# Altium PCB BatteryManagementSystem_oldcpu.PcbDoc (part 1 of 2)
Units mil, origin at the board's own origin, x right, y up, seen from the top; angles counter-clockwise.
Board outline 5250 x 2500 mil, 4 copper layers (Top Layer, Internal Plane 2, Internal Plane 1, Bottom Layer); 223 components, 168 nets, 746 pads, 194 vias.
Unrouted connection lines stored in the file: 11.
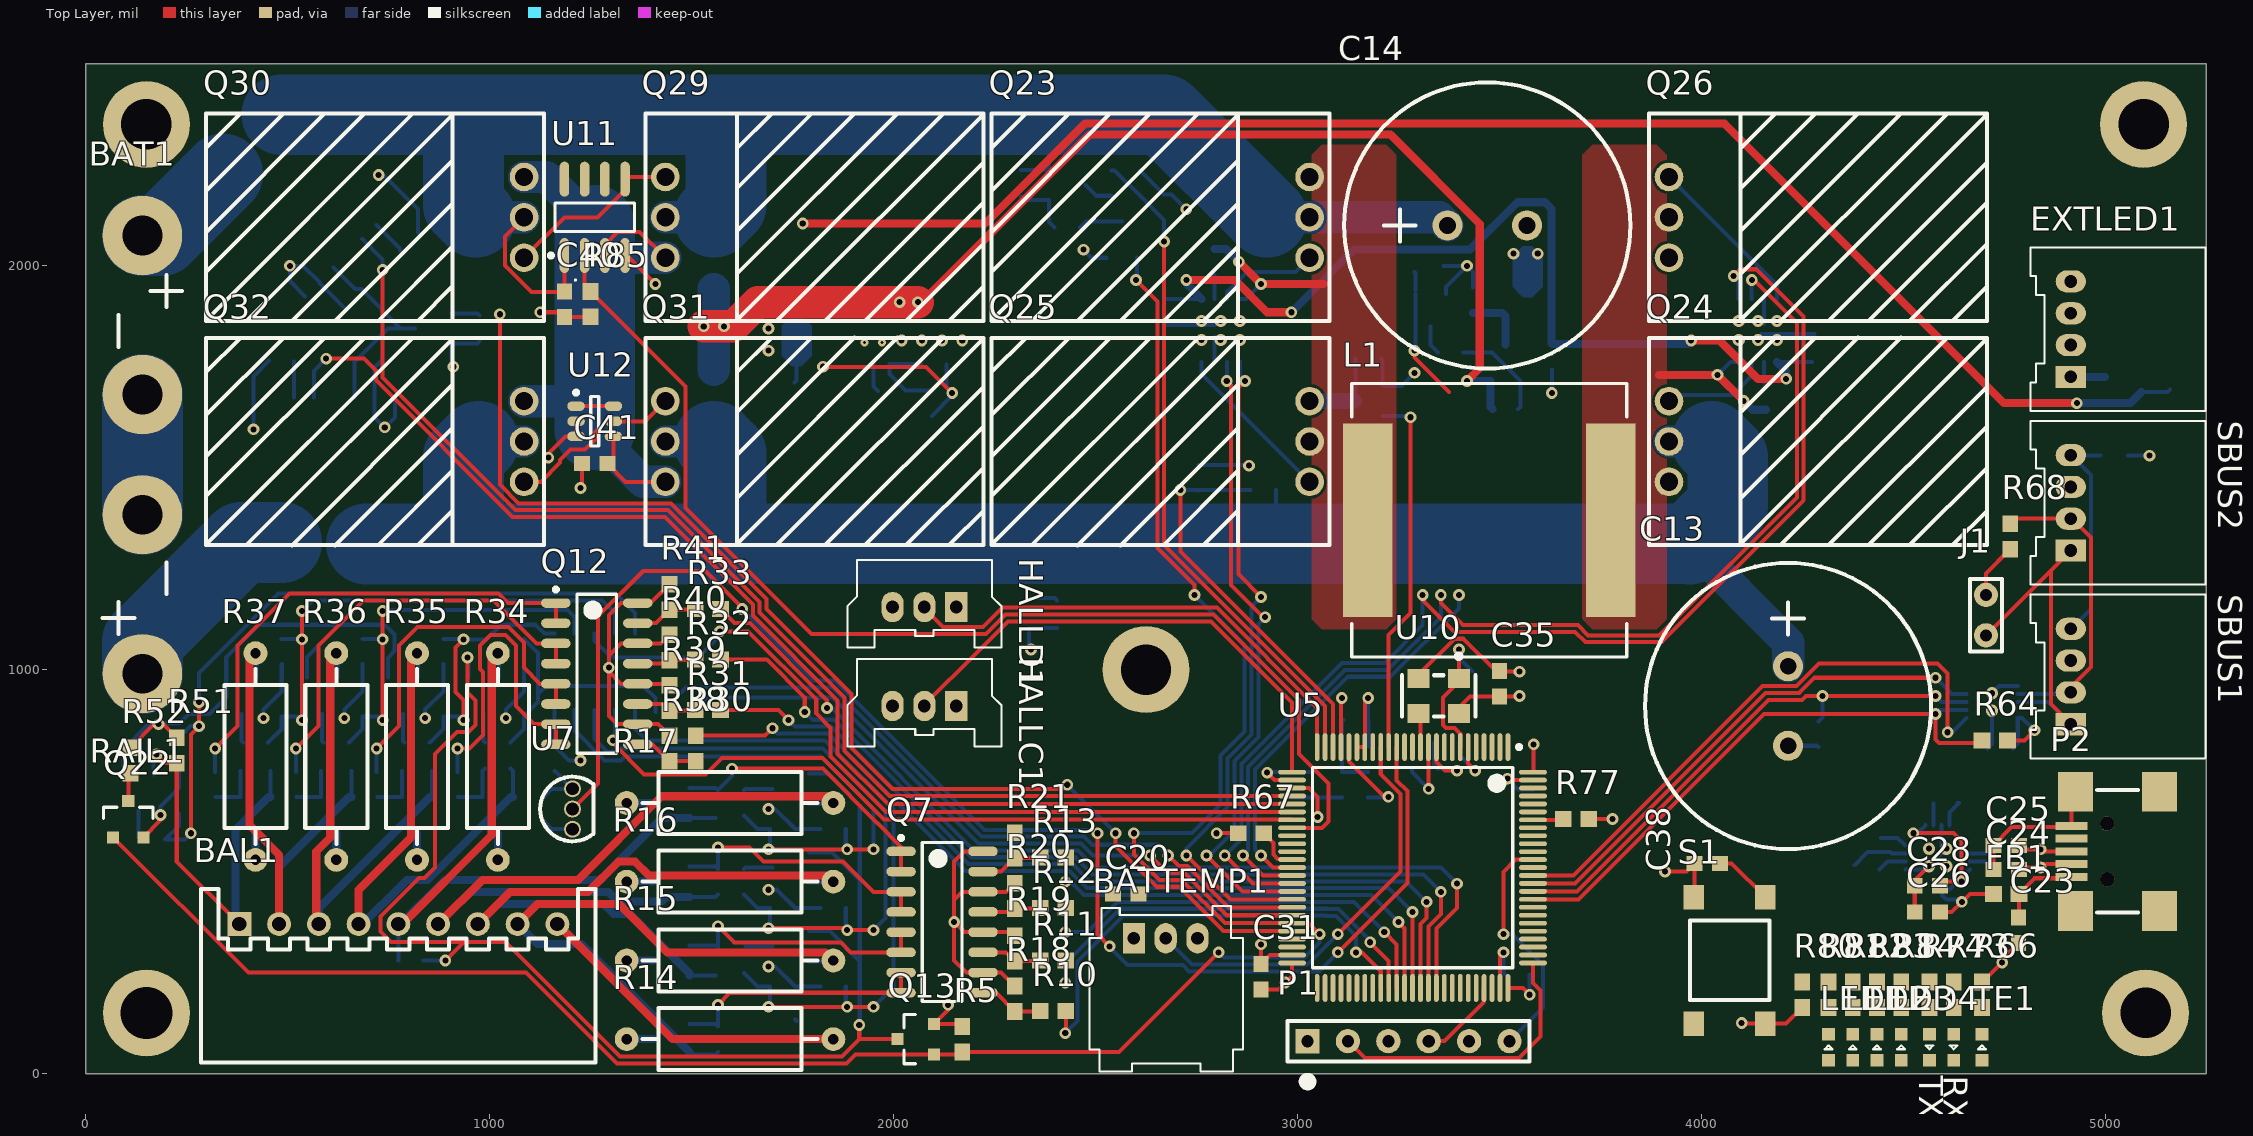
[diagram p0: Top Layer view]
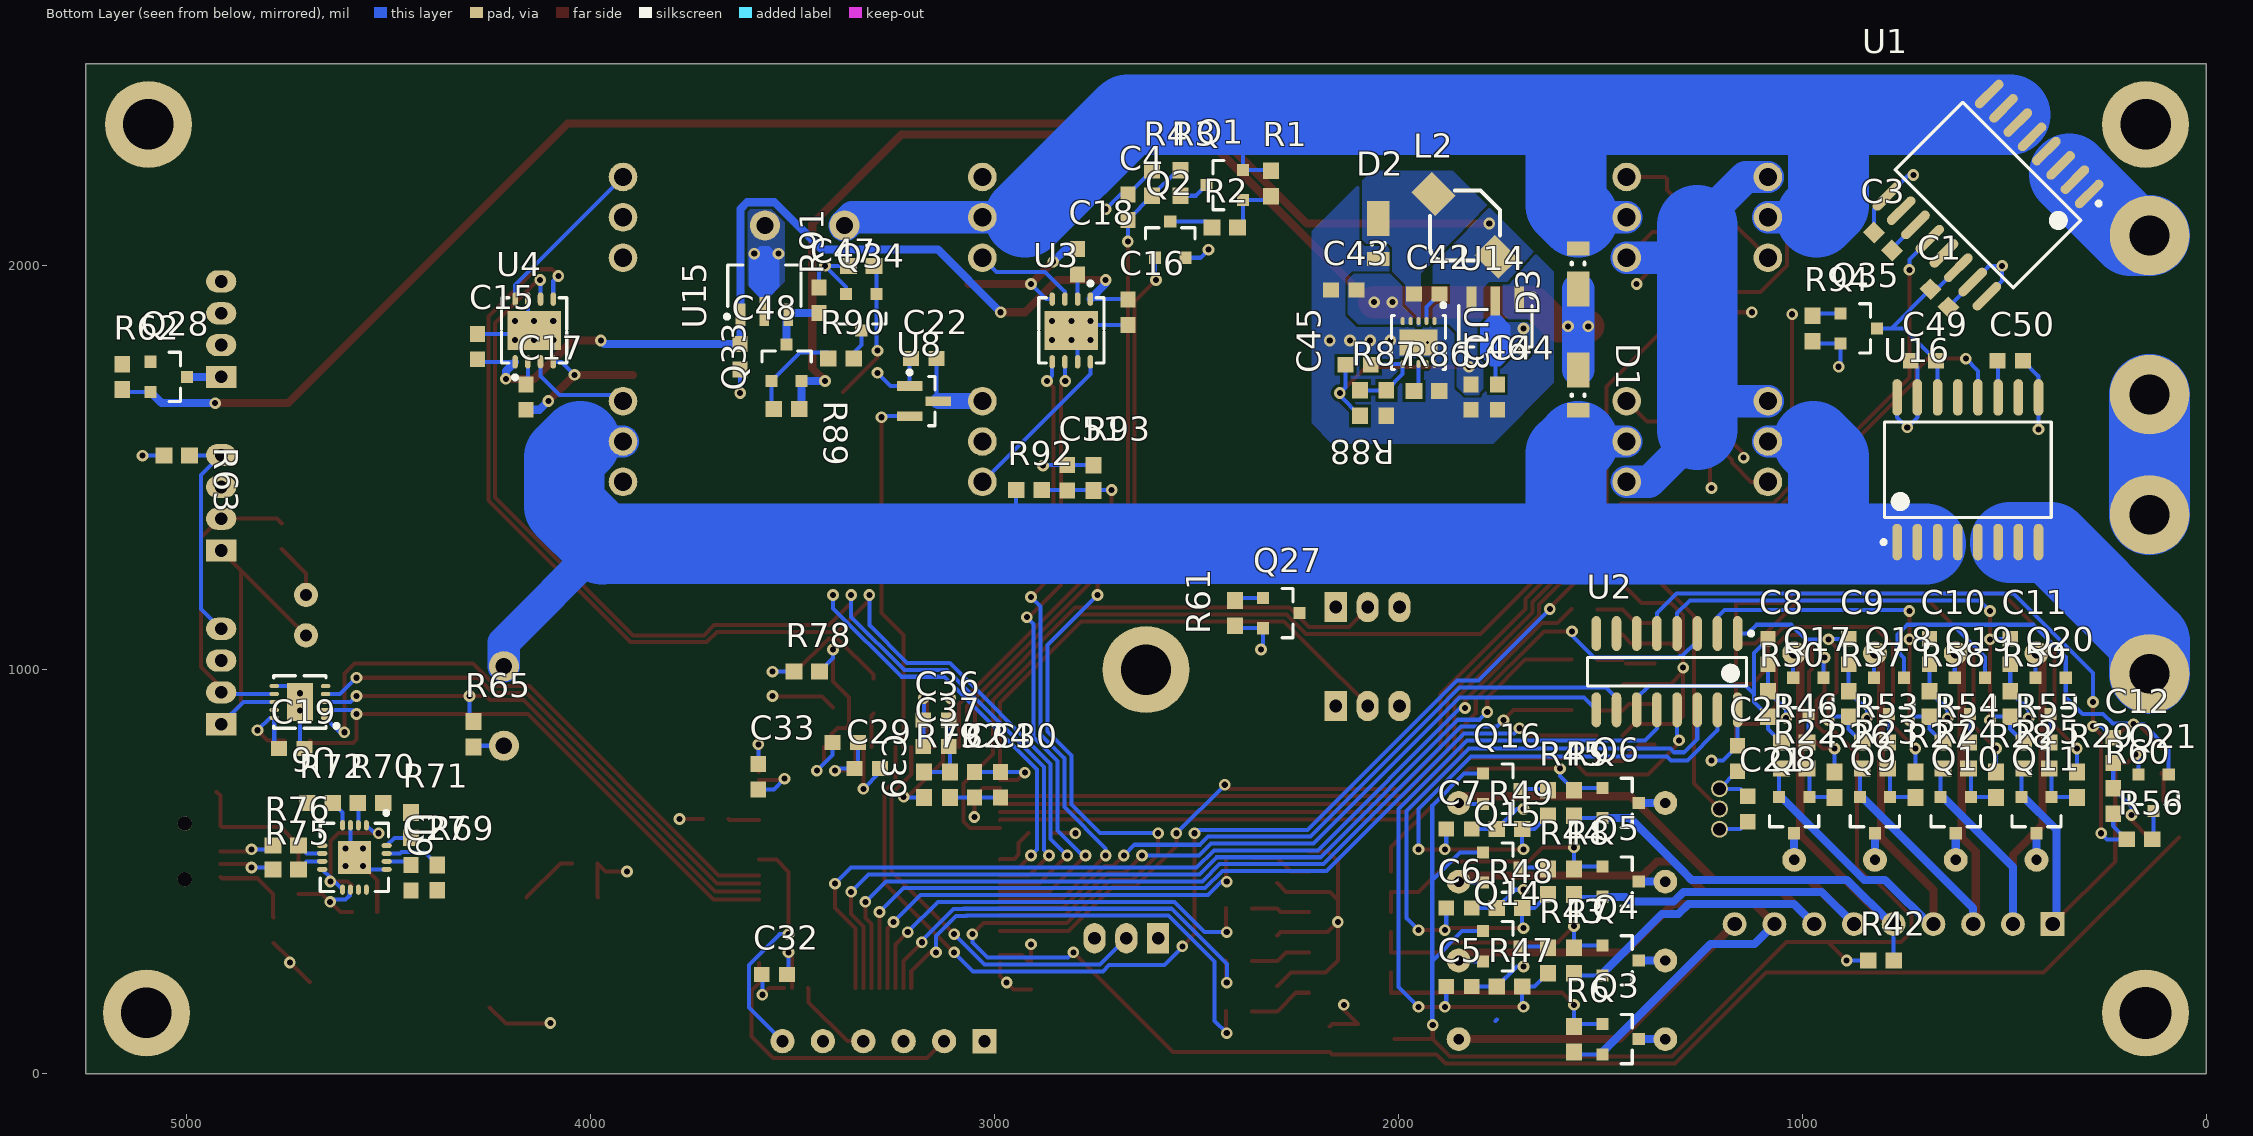
[diagram p1: Bottom Layer view, seen from below]
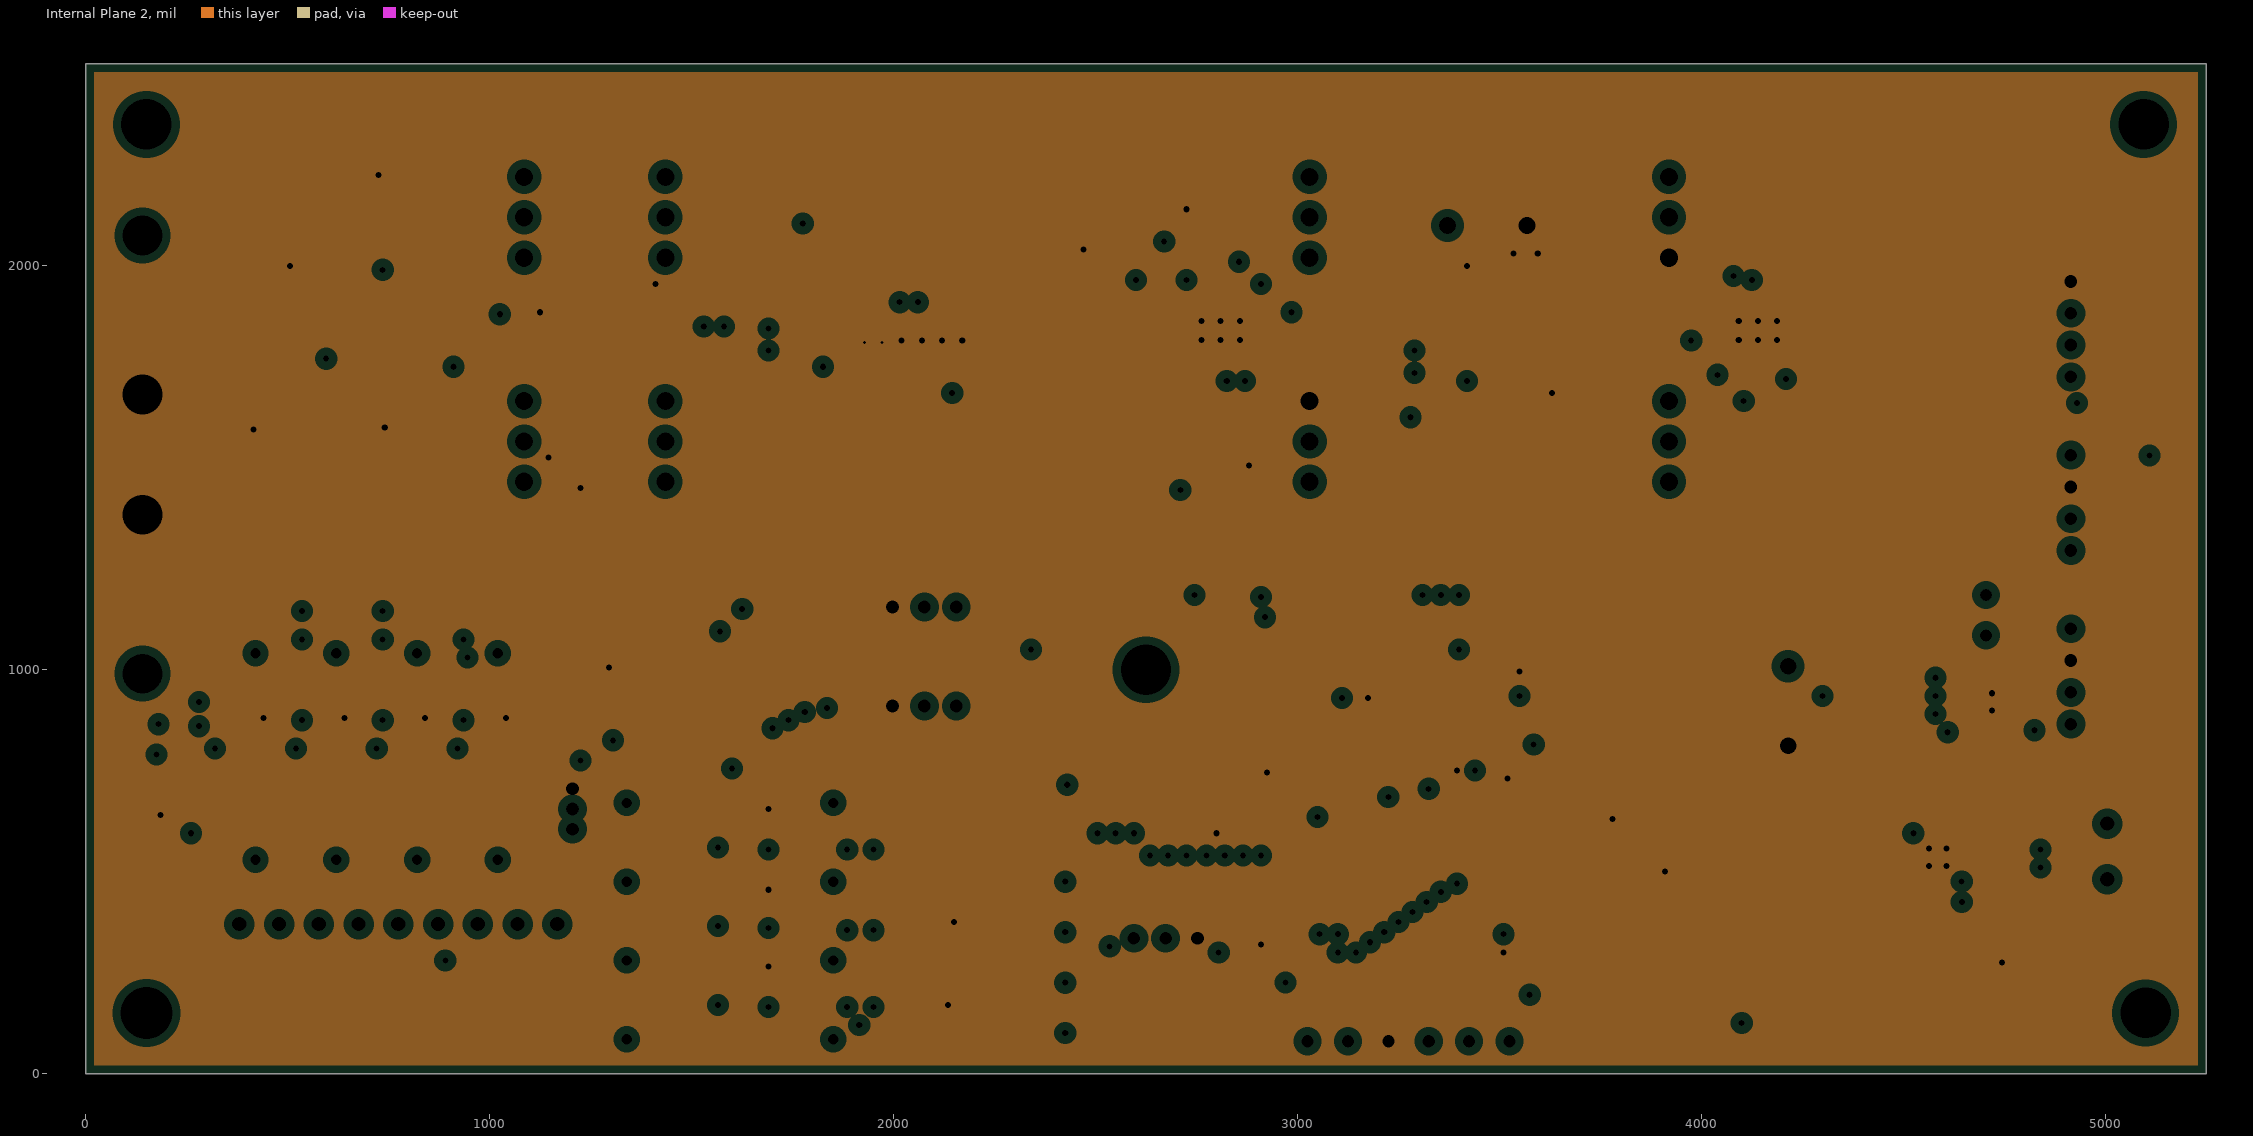
[diagram p2: Internal Plane 2, clearances drawn from the general rule]
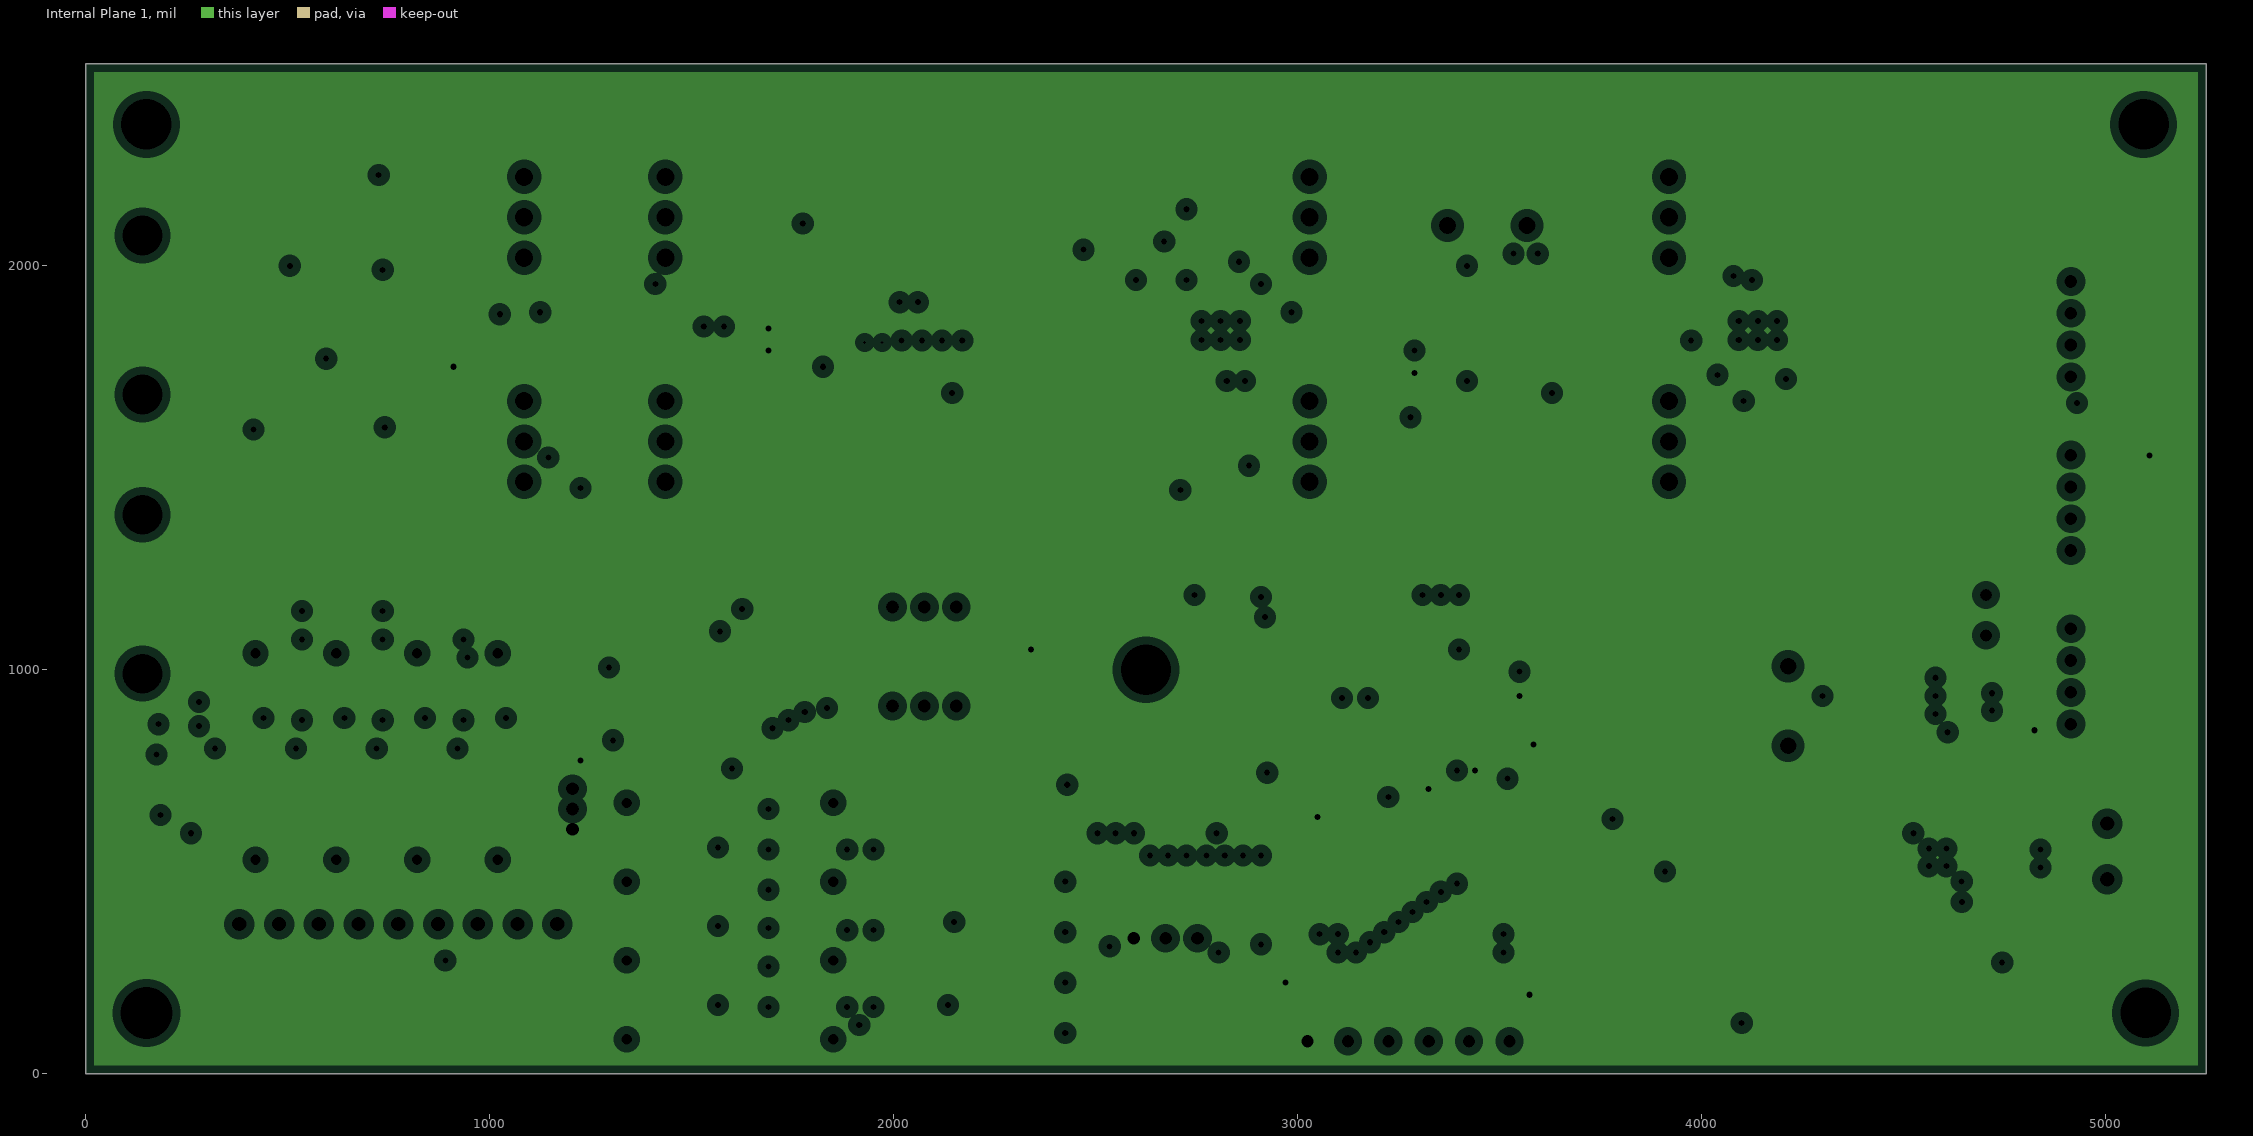
[diagram p3: Internal Plane 1, clearances drawn from the general rule]

## Layer stack, top to bottom
Top Layer: signal copper 1.4
Dielectric: core 12.6, FR-4, Dk 4.8
Internal Plane 2: plane copper 1.4, net GND
Dielectric: prepreg 12.6, FR-4, Dk 4.8
Internal Plane 1: plane copper 1.4, net 3V3
Dielectric: core 12.6, FR-4, Dk 4.8
Bottom Layer: signal copper 1.4

## Board outline
0,0 0,2500 5250,2500 5250,0

## Design rules (kind name [scope] priority, off if disabled: settings)
Clearance [All] p1: gap=7
HoleSize [All] p1: absolutevalues=TRUE maxlimit=100 minlimit=15 maxpercent=80.000 minpercent=20.000
MinimumAnnularRing [All] p1: minimumring=7
MinimumSolderMaskSliver [All] p1: minsoldermaskwidth=6
PlaneClearance [All] p1: clearance=20
PlaneConnect [All] p1: planeconnectstyle=Relief reliefexpansion=20 reliefentries=4 reliefconductorwidth=10 reliefairgap=10
PolygonConnect [All] p1: connectstyle=Direct reliefconductorwidth=10 reliefentries=4 polygonreliefangle="90 Angle" airgapwidth=10
RoutingVias [All] p1: holewidth=7 width=29 viastyle="Through Hole" minholewidth=7 minwidth=29 maxholewidth=28 maxwidth=50
SilkscreenOverComponentPads [IsPad] p1: minsilkscreentomaskgap=10
SolderMaskExpansion BlobMaskExpansion [InNetClass('Blob') AND IsTrack] p1: expansion=-25
SolderMaskExpansion [All] p2: expansion=4
Width BlobWidth [InNetClass('Blob')] p1: maxlimit=200 minlimit=10 preferedwidth=10
Width [All] p2: maxlimit=100 minlimit=10 preferedwidth=10
23 further rules are at their usual default settings.

## Classes and differential pairs
component class Top: Q35 R94
component class U_Battery: BAL1 BAT1 C1 C2 C3 C4 C5 C6 C7 C8 C9 C10 C11 C12 Q1 Q2 Q3 Q4 Q5 Q6 Q7 Q8 Q9 Q10 Q11 Q12 Q13 Q14 Q15 Q16 Q17 Q18 Q19 Q20 Q21 Q22 R1 R2 R3 R4 R5 R6 R7 R8 R9 R10 R11 R12 R13 R14 R15 R16 R17 R18 R19 R20 R21 R22 R23 R24 R25 R26 R27 R28 R29 R30 R31 R32 R33 R34 R35 R36 R37 R38 R39 R40 R41 R42 R43 R44 R45 R46 R47 R48 R49 R50 R51 R52 R53 R54 R55 R56 R57 R58 R59 R60 U1 U2
component class U_Charge: C13 C14 C15 C16 C17 C18 L1 Q23 Q24 Q25 Q26 U3 U4
component class U_CPU: BATTEMP1 C19 C20 C21 C22 C23 C24 C25 C26 C27 C28 C29 C30 C31 C32 C33 C34 C35 C36 C37 C38 C39 EXTLED1 FB1 FB2 HALLC1 HALLD1 J1 LED1 LED2 LED3 LED4 P1 P2 Q27 Q28 R61 R62 R63 R64 R65 R66 R67 R68 R69 R70 R71 R72 R73 R74 R75 R76 R77 R78 R79 R80 R81 R82 R83 R84 RX1 S1 SBUS1 SBUS2 TE1 TX1 U5 U6 U7 U8 U9 U10
component class U_Discharge: C40 C41 Q29 Q30 Q31 Q32 R85 U11 U12
component class U_Power: C42 C43 C44 C45 C46 C47 C48 D1 D2 D3 L2 Q33 Q34 R86 R87 R88 R89 R90 R91 U13 U14 U15
component class U_Rail: C49 C50 C51 R92 R93 RAIL1 U16
net class BAL[8..1]: BAL1 BAL2 BAL3 BAL4 BAL5 BAL6 BAL7 BAL8
net class Blob: BAT+ GND NetBAT1_+ NetC41_2 NetRAIL1_+ RAIL+

## Components (designator, comment, footprint, x,y, rotation, side; value= is the part's Value field where it differs from the comment)
BAL1 "JST1x9" JST1x9 380,370 r0 top
BAT1 "BATWIRE" BATWIRE12 140,2075 r270 top
BATTEMP1 "3pos RA sherlock connector" MOLEX-HDR-1X3-SHERLOCK-RA 2595,335 r180 top
C1 "Cap" CAPC0603 660,1920 r225 bottom
C2 "Cap" CAPC0603 1160,780 r270 bottom
C3 "Cap" CAPC0603 800,2060 r45 bottom
C4 "Cap" CAPC0603 2670,2145 r90 bottom
C5 "Cap" CAPC0603 1850,215 r180 bottom
C6 "Cap" CAPC0603 1850,410 r180 bottom
C7 "Cap" CAPC0603 1850,605 r180 bottom
C8 "Cap" CAPC0603 1085,1045 r270 bottom
C9 "Cap" CAPC0603 885,1045 r270 bottom
C10 "Cap" CAPC0603 685,1045 r270 bottom
C11 "Cap" CAPC0603 485,1045 r270 bottom
C12 "Cap" CAPC0603 230,800 r270 bottom
C13 "CapPol" CAP1000uF 4215,910 r270 top
C14 "CapPol" CAP1000uF 3470,2100 r0 top
C15 "Cap" CAPC0603 4280,1800 r90 bottom
C16 "Cap" CAPC0603 2670,1885 r270 bottom
C17 "Cap" CAPC0603 4160,1675 r90 bottom
C18 "Cap" CAPC0603 2795,2010 r270 bottom
C19 "Cap" CAPC0603 4740,805 r0 bottom
C20 "Cap" CAPC0603 2575,445 r180 top
C21 "Cap" CAPC0603 1135,655 r270 bottom
C22 "Cap" CAPC0603 3175,1770 r0 bottom
C23 "Cap" CAPC0603 4785,355 r270 top
C24 "Cap" CAPC0603 4755,505 r180 top
C25 "Cap" CAPC0603 4755,565 r180 top
C26 "Cap" CAPC0603 4560,400 r180 top
C27 "Cap" CAPC0603 4445,485 r270 bottom
C28 "Cap" CAPC0603 4560,465 r180 top
C29 "Cap" CAPC0603 3315,755 r0 bottom
C30 "Cap" CAPC0603 2985,715 r90 bottom
C31 "Cap" CAPC0603 2910,240 r90 top
C32 "Cap" CAPC0603 3545,245 r180 bottom
C33 "Cap" CAPC0603 3585,735 r270 bottom
C34 "Cap" CAPC0603 3050,715 r90 bottom
C35 "Cap" CAPC0603 3500,965 r90 top
C36 "Cap" CAPC0603 3145,875 r0 bottom
C37 "Cap" CAPC0603 3145,810 r0 bottom
C38 "Cap" CAPC0603 4015,520 r180 top
C39 "Cap" CAPC0603 3370,820 r180 bottom
C40 "CapPol" CAPP0603 1185,1905 r270 top
C41 "Cap" CAPC0603 1260,1510 r0 top
C42 "Cap" CAPC0603 1930,1930 r0 bottom
C43 "Cap" CAPC0603 2135,1940 r0 bottom
C44 "Cap" CAPC0603 1755,1675 r270 bottom
C45 "Cap" CAPC0603 2100,1755 r0 bottom
C46 "Cap" CAPC0603 1820,1675 r270 bottom
C47 "Cap" CAPC0603 3435,1915 r90 bottom
C48 "Cap" CAPC0603 3630,1775 r270 bottom
C49 "Cap" CAPC0603 700,1765 r0 bottom
C50 "Cap" CAPC0603 485,1765 r180 bottom
C51 "Cap" CAPC0603 2820,1475 r90 bottom
D1 "DFLS160" POWERDI123 1555,1705 r270 bottom
D2 "DFLS160" POWERDI123 2050,2080 r270 bottom
D3 "DFLS160" POWERDI123 1555,1980 r90 bottom
EXTLED1 "MOLEX-HDR-1x4-SHERLOCK_RA" MOLEX-HDR-1X4-SHERLOCK-RA 4915,1725 r270 top
FB1 "FBead" RES0603 4755,445 r0 top
FB2 "FBead" RES0603 3110,715 r270 bottom
HALLC1 "MOLEX-HDR-1x3-SHERLOCK_VERT" MOLEX-HDR-1X3-SHERLOCK-VERT 2155,910 r0 top
HALLD1 "MOLEX-HDR-1x3-SHERLOCK_VERT" MOLEX-HDR-1X3-SHERLOCK-VERT 2155,1155 r0 top
J1 "Jumper" HEADER_MALE_1X2 4705,1185 r270 top
L1 "Inductor" IHLP-6767 3475,1370 r180 top
L2 "Inductor" CDPH4D19F 1835,2100 r180 bottom
LED1 "LED" LED0603 4315,65 r90 top
LED2 "LED" LED0603 4375,65 r90 top
LED3 "LED" LED0603 4435,65 r90 top
LED4 "LED" LED0603 4495,65 r90 top
P1 "SWD" SWD_STM32 3025,80 r90 top
P2 "UX60-MB-5ST" UX60-MB-5ST 5005,550 r90 top
Q1 "FDN5618P" POWERSOT-3 2430,2200 r0 bottom
Q2 "FDN5630" POWERSOT-3 2565,2065 r90 bottom
Q3 "FDN5618P" POWERSOT-3 1450,85 r180 bottom
Q4 "FDN5618P" POWERSOT-3 1450,280 r180 bottom
Q5 "FDN5618P" POWERSOT-3 1450,475 r180 bottom
Q6 "FDN5618P" POWERSOT-3 1450,670 r180 bottom
Q7 "MMPQ2222A" MMPQ2222A 2120,375 r0 top
Q8 "FDN5618P" POWERSOT-3 1020,640 r270 bottom
Q9 "FDN5618P" POWERSOT-3 820,640 r270 bottom
Q10 "FDN5618P" POWERSOT-3 620,640 r270 bottom
Q11 "FDN5618P" POWERSOT-3 420,640 r270 bottom
Q12 "MMPQ2222A" MMPQ2222A 1265,990 r0 top
Q13 "FDN5630" POWERSOT-3 2055,85 r180 top
Q14 "FDN5618P" POWERSOT-3 1745,315 r180 bottom
Q15 "FDN5618P" POWERSOT-3 1745,510 r180 bottom
Q16 "FDN5618P" POWERSOT-3 1745,705 r180 bottom
Q17 "FDN5618P" POWERSOT-3 985,935 r270 bottom
Q18 "FDN5618P" POWERSOT-3 785,935 r270 bottom
Q19 "FDN5618P" POWERSOT-3 585,935 r270 bottom
Q20 "FDN5618P" POWERSOT-3 385,935 r270 bottom
Q21 "FDN5618P" POWERSOT-3 130,695 r270 bottom
Q22 "FDN5630" POWERSOT-3 105,630 r90 top
Q23 "IRFB3306PbF" "TO-220AB HEATSINK" 3030,2120 r90 top
Q24 "IRFB3306PbF" "TO-220AB HEATSINK" 3920,1565 r270 top
Q25 "IRFB3306PbF" "TO-220AB HEATSINK" 3030,1565 r90 top
Q26 "IRFB3306PbF" "TO-220AB HEATSINK" 3920,2120 r270 top
Q27 "FDN5618P" PowerSOT-3 2290,1140 r180 bottom
Q28 "FDN5618P" PowerSOT-3 5045,1725 r180 bottom
Q29 "IRFB3306PbF" "TO-220AB Heatsink" 1435,2120 r270 top
Q30 "IRFB3306PbF" "TO-220AB Heatsink" 1085,2120 r90 top
Q31 "IRFB3306PbF" "TO-220AB HEATSINK" 1435,1565 r270 top
Q32 "IRFB3306PbF" "TO-220AB HEATSINK" 1085,1565 r90 top
Q33 "FDN5618P" PowerSOT-3 3515,1760 r90 bottom
Q34 "FDN5630" POWERSOT-3 3330,1885 r270 bottom
Q35 "FDN5618P" PowerSOT-3 860,1845 r180 bottom
R1 "Res" RES0603 2315,2203.5 r270 bottom
R2 "Res" RES0603 2430,2095 r0 bottom
R3 "Res" RES0603 2540,2205 r90 bottom
R4 "Res" RES0603 2610,2205 r90 bottom
R5 "Res" RES0603 2170,85 r90 top
R6 "Res" RES0603 1565,85 r90 bottom
R7 "Res" RES0603 1565,280 r90 bottom
R8 "Res" RES0603 1565,475 r90 bottom
R9 "Res" RES0603 1565,670 r90 bottom
R10 "Res" RES0603 2395,155 r180 top
R11 "Res" RES0603 2395,280 r180 top
R12 "Res" RES0603 2395,410 r180 top
R13 "Res" RES0603 2395,535 r180 top
R14 "Res" FMP200 1595,85 r0 top
R15 "Res" FMP200 1595,280 r0 top
R16 "Res" FMP200 1595,475 r0 top
R17 "Res" FMP200 1595,670 r0 top
R18 "Res" RES0603 2300,185 r90 top
R19 "Res" RES0603 2300,310 r90 top
R20 "Res" RES0603 2300,440 r90 top
R21 "Res" RES0603 2300,565 r90 top
R22 "Res" RES0603 1020,755 r180 bottom
R23 "Res" RES0603 820,755 r180 bottom
R24 "Res" RES0603 620,755 r180 bottom
R25 "Res" RES0603 420,755 r180 bottom
R26 "Res" RES0603 920,715 r90 bottom
R27 "Res" RES0603 720,715 r90 bottom
R28 "Res" RES0603 520,715 r90 bottom
R29 "Res" RES0603 320,715 r90 bottom
R30 "Res" RES0603 1510,805 r270 top
R31 "Res" RES0603 1540,900 r180 top
R32 "Res" RES0603 1540,1025 r180 top
R33 "Res" RES0603 1540,1150 r180 top
R34 "Res" FMP200 1020,785 r90 top
R35 "Res" FMP200 820,785 r90 top
R36 "Res" FMP200 620,785 r90 top
R37 "Res" FMP200 420,785 r90 top
R38 "Res" RES0603 1445,805 r90 top
R39 "Res" RES0603 1445,930 r90 top
R40 "Res" RES0603 1445,1055 r90 top
R41 "Res" RES0603 1445,1180 r90 top
R42 "Res" RES0603 805,280 r0 bottom
R43 "Res" RES0603 1630,280 r270 bottom
R44 "Res" RES0603 1630,475 r270 bottom
R45 "Res" RES0603 1630,670 r270 bottom
R46 "Res" RES0603 1020,820 r0 bottom
R47 "Res" RES0603 1725,215 r0 bottom
R48 "Res" RES0603 1725,410 r0 bottom
R49 "Res" RES0603 1725,605 r0 bottom
R50 "Res" RES0603 1085,915 r90 bottom
R51 "Res" RES0603 225,800 r90 top
R52 "Res" RES0603 110,775 r270 top
R53 "Res" RES0603 820,820 r0 bottom
R54 "Res" RES0603 620,820 r0 bottom
R55 "Res" RES0603 420,820 r0 bottom
R56 "Res" RES0603 165,580 r0 bottom
R57 "Res" RES0603 885,915 r90 bottom
R58 "Res" RES0603 685,915 r90 bottom
R59 "Res" RES0603 485,915 r90 bottom
R60 "Res" RES0603 230,675 r90 bottom
R61 "Res" RES0603 2405,1140 r90 bottom
R62 "Res" RES0603 5160,1725 r90 bottom
R63 "Res" RES0603 5025,1530 r180 bottom
R64 "Res" RES0603 4726.5,825 r180 top
R65 "Res" RES0603 4290,840 r270 bottom
R66 "Res" RES0603 4695,195 r90 top
R67 "Res" RES0603 2885,595 r180 top
R68 "Res" RES0603 4765,1330 r90 top
R69 "Res" RES0603 4380,485 r90 bottom
R70 "Res" RES0603 4545,670 r0 bottom
R71 "Res" RES0603 4445,615 r270 bottom
R72 "Res" RES0603 4670,670 r180 bottom
R73 "Res" RES0603 4625,195 r270 top
R74 "Res" RES0603 4565,195 r270 top
R75 "Res" RES0603 4755,505 r180 bottom
R76 "Res" RES0603 4755,565 r180 bottom
R77 "Res" RES0603 3690,630 r0 top
R78 "Res" RES0603 3465,995 r180 bottom
R79 "Res" RES0603 3175,715 r270 bottom
R80 "Res" RES0603 4250,195 r270 top
R81 "Res" RES0603 4315,195 r90 top
R82 "Res" RES0603 4375,195 r90 top
R83 "Res" RES0603 4435,195 r90 top
R84 "Res" RES0603 4495,195 r90 top
R85 "Res" RES0603 1250,1905 r270 top
R86 "Res" RES0603 1930,1690 r180 bottom
R87 "Res" RES0603 2095,1660 r90 bottom
R88 "Res" RES0603 2030,1660 r270 bottom
R89 "Res" RES0603 3515,1645 r180 bottom
R90 "Res" RES0603 3380,1770 r0 bottom
R91 "Res" RES0603 3330,2000 r0 bottom
R92 "Res" RES0603 2915,1445 r180 bottom
R93 "Res" RES0603 2755,1475 r90 bottom
R94 "Res" RES0603 975,1845 r90 bottom
RAIL1 "BATWIRE" BATWIRE12 140,990 r90 top
RX1 "LED" LED0603 4625,65 r270 top
S1 "Button" PTS645xxxxSMTR92 4070,280 r90 top
SBUS1 "MOLEX-HDR-1x4-SHERLOCK_RA" MOLEX-HDR-1X4-SHERLOCK-RA 4915,865 r270 top
SBUS2 "MOLEX-HDR-1x4-SHERLOCK_RA" MOLEX-HDR-1X4-SHERLOCK-RA 4915,1295 r270 top
TE1 "LED" LED0603 4695,65 r90 top
TX1 "LED" LED0603 4565,65 r270 top
U1 "ACS710" ACS710 540,2175 r315 bottom
U2 "SN74LV4052A" SN74LV4052AD 1335,995 r270 bottom
U3 "UCC27201A" UCC27201ADRMT 2810,1840 r270 bottom
U4 "UCC27201A" UCC27201ADRMT 4140,1840 r90 bottom
U5 "STM32F103VC" STM32F103VC 3285,510 r270 top
U6 "ISL3179EFRZ" ISL3179EFRZ 4720,920 r0 bottom
U7 "MCP9701" MCP970X-E/TO 1205,655 r90 top
U8 "MCP9701" MCP970X-E/TT 3175,1665 r180 bottom
U9 "FT230XQ-T" FT230XQ-T 4585,535 r270 bottom
U10 "636L3C008M" 636L3C 3350,935 r180 top
U11 "MIC5011" MIC5011 1260,2120 r90 top
U12 "LM5050-1" LM5050 1260,1615 r0 top
U13 "LT3991" LT3991 1950,1810 r270 bottom
U14 "MCP1703AT" MCP1703AT-XX02EMB 1760,1850 r270 bottom
U15 "L78L15AC" L78LXXAXUTR 3570,1950 r90 bottom
U16 "ACS710" ACS710 590,1495 r90 bottom

## Footprints (in the part's own frame and the unit in brackets; to place one, negate y for a bottom-side part, rotate by r counter-clockwise, add the part's x,y. Pads: shape width x height; smd on the part's side, far side on the other; paste and mask are expansions set on the pad)
636L3C [mm]
  rect 1.4x1.2 smd: 1(-1.27,-1.1) 2(1.27,-1.1) 3(1.27,1.1) 4(-1.27,1.1)
  silkscreen extent -2.3,-2.65 2.3,1.3, body extent -2.5,-1.6 2.5,1.6, height 2
ACS710 [mm] "SOIC, 16-Leads, Body 10.5x7.6mm (max), Pitch 1.27mm, IPC Medium Density"
  oval 2.3x0.6 smd: 1(-4.55,4.445) 2(-4.55,3.175) 3(-4.55,1.905) 4(-4.55,0.635) 5(-4.55,-0.635) 6(-4.55,-1.905) 7(-4.55,-3.175) 8(-4.55,-4.445) 9(4.55,-4.445) 10(4.55,-3.175) 11(4.55,-1.905) 12(4.55,-0.635) 13(4.55,0.635) 14(4.55,1.905) 15(4.55,3.175) 16(4.55,4.445)
  silkscreen extent -4.67,-5.25 3,5.42, body extent -3.8,-5.25 3.8,5.25, height 2.65
BATWIRE12 [mm] "Two 12AWG wires soldered directly to the board"
  round 5 hole 2.5: +(0,0) -(10,0)
  silkscreen extent 2.5,-1.5 7,2.5
CAP1000uF [mm] "CAP ALUM 1000UF 50V 20% RADIAL"
  round 1.9 hole 1.05: 1(-2.5,0) 2(2.5,0)
  silkscreen extent -9,-9 9,9, body extent -8.93,-8.98 9,8.98, height 20
CAPC0603 [mm] "Chip Capacitor, 2-Leads, Body 1.60x0.80mm, IPC Medium Density"
  rect 1x0.95 smd: 1(-0.8,0) 2(0.8,0)
  body extent -0.88,-0.48 0.87,0.48, height 0.8
CAPP0603 [mm] "Chip Capacitor, 2-Leads, Body 1.60x0.80mm, IPC Medium Density"
  rect 1x0.95 smd: 1(-0.8,0) 2(0.8,0)
  silkscreen extent -1.56,0.64 -1.46,0.74, body extent -0.88,-0.48 0.87,0.48, height 0.8
CDPH4D19F [mm] "SMD Power Inductor"
  rect 1.8x2.1 smd rot 45: 1(-1.98,1.98) 2(1.98,-1.98)
  silkscreen extent -2.19,-2.19 2.21,2.21, body extent -2.45,-2.45 2.45,2.45, height 2
FMP200 [mm] "Power resistor Yageo 2W"
  round 1.5 hole 0.65: 1(-6.5,0) 2(6.5,0)
  silkscreen extent -5.5,-1.95 5.5,1.95, body extent -4.5,-1.93 4.5,1.95, height 3.9
FT230XQ-T [mm] "IC USB SERIAL BASIC UART 16QFN"
  oval 0.65x0.3 smd mask+0.07: 1(-2.025,0.75) 2(-2.025,0.25) 3(-2.025,-0.25) 4(-2.025,-0.75) 9(2.025,-0.75) 10(2.025,-0.25) 11(2.025,0.25) 12(2.025,0.75)
  oval 0.3x0.65 smd mask+0.07: 5(-0.75,-2.025) 6(-0.25,-2.025) 7(0.25,-2.025) 8(0.75,-2.025) 13(0.75,2.025) 14(0.25,2.025) 15(-0.25,2.025) 16(-0.75,2.025)
  rect 2.08x2.08 smd mask+0.07: 13(0,0)
  silkscreen extent -2.92,-2.15 2.15,2.15, body extent -2,-2 2,2, height 0.8
HEADER_MALE_1X2 [mil]
  round 60 hole 30: 1(0,0) 2(100,0)
  silkscreen extent -40,-40 140,40
IHLP-6767 [mm] "Low profile, high current IHLP inductor"
  rect 3.125x12.19 smd: 1(-7.648,0) 2(7.648,0)
  silkscreen extent -8.65,-8.6 8.65,8.6, body extent -8.64,-8.58 8.64,8.57, height 7
ISL3179EFRZ [mm] "TXRX ESD 3.3V RS-485/422 10-DFN"
  oval 0.6x0.25 smd mask+0.07: 1(-1.615,1) 2(-1.615,0.5) 3(-1.615,0) 4(-1.615,-0.5) 5(-1.615,-1) 6(1.615,-1) 7(1.615,-0.5) 8(1.615,0) 9(1.615,0.5) 10(1.615,1)
  rect 1.64x2.38 smd mask+0.07: 6(0,0)
  silkscreen extent -2.42,-1.65 1.65,1.65, body extent -1.5,-1.5 1.5,1.5, height 0.9
JST1x9 [mm]
  rect 1.5x1.5 hole 0.9: 1(0,0)
  round 1.5 hole 0.9: 2(2.5,0) 3(5,0) 4(7.5,0) 5(10,0) 6(12.5,0) 7(15,0) 8(17.5,0) 9(20,0)
  silkscreen extent -2.4,-8.7 22.4,2.2
L78LXXAXUTR [mm] "SOT89, 3-Leads, Body 4.50x2.45mm, Pitch 1.50mm, Lead Span 4.1mm, IPC Medium Density"
  rect 1.4x0.6 smd: 1(-1.8,1.5) 3(-1.8,-1.5)
  rect 1.8x0.6 smd: 2(-1.6,0)
  Top Layer region: -0.7,0.3 -0.05,0.95 1.85,0.95 2.5,0.3 2.5,-0.3 1.85,-0.95 -0.05,-0.95 -0.7,-0.3
  silkscreen extent -2.05,-2.3 1.32,2.48, body extent -1.28,-2.3 1.32,2.3, height 1.6
LED0603 [mm] "Chip LED, 2-Leads, Body 1.60x0.80mm, IPC Medium Density"
  rect 0.8x0.8 smd: A(-0.825,0) C(0.825,0)
  silkscreen extent -0.13,-0.25 0.12,0.25, body extent -0.88,-0.48 0.87,0.47, height 0.8
LM5050 [mm] "SOT23, 6-Leads, Body 2.90x2.80mm, Pitch 0.95mm, IPC Medium Density"
  oval 1.1x0.6 smd: 1(-1.175,0.95) 2(-1.175,0) 3(-1.175,-0.95) 4(1.175,-0.95) 5(1.175,0) 6(1.175,0.95)
  silkscreen extent -1.3,-1.55 0.25,1.92, body extent -0.87,-1.52 0.88,1.53, height 1.1
LT3991 [mm] "QFN, 10-Leads, Body 3.00x3.00mm, Pitch 0.50mm, Thermal Pad 2.38x1.65mm, IPC Medium Density"
  oval 0.5x0.25 smd: 1(-1.35,1) 2(-1.35,0.5) 3(-1.35,0) 4(-1.35,-0.5) 5(-1.35,-1) 6(1.35,-1) 7(1.35,-0.5) 8(1.35,0) 9(1.35,0.5) 10(1.35,1)
  rect 1.65x2.38 smd: PAD(0,0)
  silkscreen extent -2.47,-1.7 1.7,1.7, body extent -1.55,-1.55 1.55,1.55, height 0.8
MCP970X-E/TO [mil] "Low-Power Linear Active Thermistor ICs"
  round 42 hole 31.5: 1(-50,0) 2(0,0) 3(50,0)
  silkscreen extent -80,-51 80,80, body extent -92,-92 93,92, height 209
MCP970X-E/TT [mm] "SOT23, 3-Leads, Body 2.86x2.37mm, Pitch 0.95mm, IPC Medium Density"
  rect 1.6x0.6 smd: 1(-0.9,0.95) 2(-0.9,-0.95) 3(0.9,0)
  silkscreen extent -1.03,-1.55 0.7,1.92, body extent -0.7,-1.52 0.7,1.53, height 1.12
MCP1703AT-XX02EMB [mm] "SOT89, 3-Leads, Body 4.49x2.45mm, Pitch 1.50mm, Lead Span 4.1mm, IPC Medium Density"
  rect 1.4x0.6 smd: 1(-1.8,1.5) 3(-1.8,-1.5)
  rect 1.8x0.6 smd: 2(-1.6,0)
  Top Layer region: -0.7,0.3 -0.05,0.95 1.85,0.95 2.5,0.3 2.5,-0.3 1.85,-0.95 -0.05,-0.95 -0.7,-0.3
  silkscreen extent -2.08,-2.3 1.3,2.47, body extent -1.3,-2.3 1.3,2.3, height 1.6
MIC5011 [mm] "SOIC, 8-Leads, Body 4.90x3.90mm, Pitch 1.27mm, IPC Medium Density"
  oval 2.2x0.6 smd: 1(-2.4,1.905) 2(-2.4,0.635) 3(-2.4,-0.635) 4(-2.4,-1.905) 5(2.4,-1.905) 6(2.4,-0.635) 7(2.4,0.635) 8(2.4,1.905)
  silkscreen extent -2.52,-2.5 0.9,2.88, body extent -2,-2.5 2,2.5, height 1.63
MMPQ2222A [mm] "SOIC, 16-Leads, Body 9.90x3.90mm, Pitch 1.27mm, IPC Medium Density"
  oval 1.85x0.6 smd: 1(-2.575,3.175) 1(-2.575,4.445) 3(-2.575,0.635) 3(-2.575,1.905) 5(-2.575,-1.905) 5(-2.575,-0.635) 7(-2.575,-4.445) 7(-2.575,-3.175) 9(2.575,-4.445) 10(2.575,-3.175) 11(2.575,-1.905) 12(2.575,-0.635) 13(2.575,0.635) 14(2.575,1.905) 15(2.575,3.175) 16(2.575,4.445)
  silkscreen extent -2.7,-5 1.25,5.42, body extent -2,-5 2,5, height 1.75
MOLEX-HDR-1X3-SHERLOCK-RA [mm]
  rect 1.397x1.905 hole 0.8: 1(0,0)
  oval 1.397x1.905 hole 0.8: 2(-2,0) 3(-4,0)
  silkscreen extent -6.86,-2.03 2.79,8.38, body extent -6.88,-1.99 2.82,8.51, height 5.75
MOLEX-HDR-1X3-SHERLOCK-VERT [mm]
  rect 1.397x1.905 hole 0.8: 1(0,0)
  oval 1.397x1.905 hole 0.8: 2(-2,0) 3(-4,0)
  silkscreen extent -6.85,-2.55 2.85,2.95, body extent -6.88,-2.57 2.82,2.98, height 8.57
MOLEX-HDR-1X4-SHERLOCK-RA [mm]
  rect 1.397x1.905 hole 0.8: 1(0,0)
  oval 1.397x1.905 hole 0.8: 2(-2,0) 3(-4,0) 4(-6,0)
  silkscreen extent -8.15,-2.55 2.15,8.46, body extent -8.17,-1.98 2.13,8.52, height 5.54
POWERDI123 [mm] "Diodes INC Power Diode"
  rect 0.9x1.4 smd: A(1.6,0)
  rect 2.2x1.4 smd: C(-0.95,0)
  silkscreen extent 0.6,-0.4 0.7,0.4, body extent -1.4,-0.89 1.4,0.89, height 0.98
POWERSOT-3 [mm] "SOT23, 3-Leads, Body 2.92x2.47mm, Pitch 0.95mm, IPC Medium Density"
  rect 0.76x0.76 smd: D(1.145,0) G(-1.145,0.95) S(-1.145,-0.95)
  silkscreen extent 0.04,-1.55 0.74,1.55, body extent -0.74,-1.52 0.74,1.53, height 1.12
PowerSOT-3 [mm] "SOT23, 3-Leads, Body 2.92x2.47mm, Pitch 0.95mm, IPC Medium Density"
  rect 0.76x0.76 smd: D(1.145,0) G(-1.145,0.95) S(-1.145,-0.95)
  silkscreen extent 0.04,-1.55 0.74,1.55, body extent -0.74,-1.52 0.74,1.53, height 1.12
PTS645xxxxSMTR92 [mm] "PTS645 Series SMT 6 mm Tactile Switch"
  rect 1.555x1.3 smd: A(-3.975,2.25) A(3.975,2.25) B(-3.975,-2.25) B(3.975,-2.25)
  silkscreen extent -2.5,-2.5 2.5,2.5, body extent -3,-3 3,3, height 4.5
RES0603 [mm] "Chip Resistor, 2-Leads, Body 1.60x0.80mm, IPC Medium Density"
  rect 1.05x1 smd: 1(-0.8,0) 2(0.8,0)
  body extent -0.88,-0.48 0.87,0.47, height 0.8
SN74LV4052AD [mm] "SOIC, 16-Leads, Body 10.0x4.0mm (max), Pitch 1.27mm, IPC Medium Density"
  oval 2.2x0.6 smd mask+0.07: 1(-2.4,4.445) 2(-2.4,3.175) 3(-2.4,1.905) 4(-2.4,0.635) 5(-2.4,-0.635) 6(-2.4,-1.905) 7(-2.4,-3.175) 8(-2.4,-4.445) 9(2.4,-4.445) 10(2.4,-3.175) 11(2.4,-1.905) 12(2.4,-0.635) 13(2.4,0.635) 14(2.4,1.905) 15(2.4,3.175) 16(2.4,4.445)
  silkscreen extent -2.52,-5 0.9,5.42, body extent -2,-5 2,5, height 1.75
STM32F103VC [mm] "STM32F103 LQFP100 package"
  oval 1.75x0.3 smd mask+0.07: 1(-7.575,6) 2(-7.575,5.5) 3(-7.575,5) 4(-7.575,4.5) 5(-7.575,4) 6(-7.575,3.5) 7(-7.575,3) 8(-7.575,2.5) 9(-7.575,2) 10(-7.575,1.5) 11(-7.575,1) 12(-7.575,0.5) 13(-7.575,0) 14(-7.575,-0.5) 15(-7.575,-1) 16(-7.575,-1.5) 17(-7.575,-2) 18(-7.575,-2.5) 19(-7.575,-3) 20(-7.575,-3.5) 21(-7.575,-4) 22(-7.575,-4.5) 23(-7.575,-5) 24(-7.575,-5.5) 25(-7.575,-6) 51(7.575,-6) 52(7.575,-5.5) 53(7.575,-5) 54(7.575,-4.5) 55(7.575,-4) 56(7.575,-3.5) 57(7.575,-3) 58(7.575,-2.5) 59(7.575,-2) 60(7.575,-1.5) 61(7.575,-1) 62(7.575,-0.5) 63(7.575,0) 64(7.575,0.5) 65(7.575,1) 66(7.575,1.5) 67(7.575,2) 68(7.575,2.5) 69(7.575,3) 70(7.575,3.5) 71(7.575,4) 72(7.575,4.5) 73(7.575,5) 74(7.575,5.5) 75(7.575,6)
  oval 0.3x1.75 smd mask+0.07: 26(-6,-7.575) 27(-5.5,-7.575) 28(-5,-7.575) 29(-4.5,-7.575) 30(-4,-7.575) 31(-3.5,-7.575) 32(-3,-7.575) 33(-2.5,-7.575) 34(-2,-7.575) 35(-1.5,-7.575) 36(-1,-7.575) 37(-0.5,-7.575) 38(0,-7.575) 39(0.5,-7.575) 40(1,-7.575) 41(1.5,-7.575) 42(2,-7.575) 43(2.5,-7.575) 44(3,-7.575) 45(3.5,-7.575) 46(4,-7.575) 47(4.5,-7.575) 48(5,-7.575) 49(5.5,-7.575) 50(6,-7.575) 76(6,7.575) 77(5.5,7.575) 78(5,7.575) 79(4.5,7.575) 80(4,7.575) 81(3.5,7.575) 82(3,7.575) 83(2.5,7.575) 84(2,7.575) 85(1.5,7.575) 86(1,7.575) 87(0.5,7.575) 88(0,7.575) 89(-0.5,7.575) 90(-1,7.575) 91(-1.5,7.575) 92(-2,7.575) 93(-2.5,7.575) 94(-3,7.575) 95(-3.5,7.575) 96(-4,7.575) 97(-4.5,7.575) 98(-5,7.575) 99(-5.5,7.575) 100(-6,7.575)
  silkscreen extent -7.7,-6.3 6.3,6.83, body extent -7,-7 7,7, height 1.6
SWD_STM32 [mil] "SWD connector matching the pinout on STM Discovery Boards"
  rect 60x60 hole 30: 1(0,0)
  round 60 hole 30: 2(0,-100) 3(0,-200) 4(0,-300) 5(0,-400) 6(0,-500)
  silkscreen extent -110,-550 50,50
"TO-220AB HEATSINK" [mm] "HEXFET Power MOSFET w/ Heat Sink"
  round 1.8 hole 1.15: D(0,0) G(-2.54,0) S(2.54,0)
  silkscreen extent -6.53,-1.25 6.52,20, body extent -6.44,-0.15 6.36,19.9, height 12.7
"TO-220AB Heatsink" [mm] "HEXFET Power MOSFET w/ Heat Sink"
  round 1.8 hole 1.15: D(0,0) G(-2.54,0) S(2.54,0)
  silkscreen extent -6.53,-1.25 6.52,20, body extent -6.44,-0.15 6.36,19.9, height 12.7
UCC27201ADRMT [mm] "IC DVR HIGH/LOW SIDE 3A 8VSON"
  oval 0.85x0.35 smd mask+0.07: 1(-1.975,1.2) 2(-1.975,0.4) 3(-1.975,-0.4) 4(-1.975,-1.2) 5(1.975,-1.2) 6(1.975,-0.4) 7(1.975,0.4) 8(1.975,1.2)
  rect 2.45x3.38 smd mask+0.07: 7(0,0)
  silkscreen extent -3.07,-2.05 2.05,2.05, body extent -2.05,-2.05 2.05,2.05, height 1
UX60-MB-5ST [mm] "USB Mini-B Recepticle"
  rect 0.5x2 smd: 1(-1.6,2.25) 2(-0.8,2.25) 3(0,2.25) 4(0.8,2.25) 5(1.6,2.25)
  rect 2.5x2.2 smd: SHD(-3.75,-3.3) SHD(-3.75,2) SHD(3.75,-3.3) SHD(3.75,2)
  round 0.9 hole 0.9 unplated: ""(-1.75,0) ""(1.75,0)
  silkscreen extent -3.85,-1.92 3.85,0.63

## Part data
BAT1 RAIL1: "Two large gauge leads soldered directly to the board."
BATTEMP1: library part MOLEX-HDR-1x3-SHERLOCK_RA, "Header, Molex, 2mm Pitch Sherlock Header, Single Row, Right Angle 3 Circuits, Length 3.3mm"
D1 D2 D3: "1.0A Surface Mount Schottky Barrier Rectifier"
EXTLED1 SBUS1 SBUS2: "Header, Molex, 2mm Pitch Sherlock Header, Single Row, Horizontal, 4 Circuits, Length 3.3mm"
FB1 FB2: "Ferrite Bead"
HALLC1 HALLD1: "Header, Molex, 2mm Pitch Sherlock Header, Single Row, Vertical, 3 Circuits, Length 3.3mm, 0353620376"
J1: "Single Jumper on 1x2 Male Header"
P1: library part SWD_STM32, "SWD connector matching the pinout on STM Discovery Boards"
P2: "USB Mini B Metal Shield SMT Type With Positioning Post"
Q1 Q3 Q4 Q5 Q6 Q8 Q9 Q10 Q11 Q14 Q15 Q16 Q17 Q18 Q19 Q20 Q21 Q27 Q28 Q33 Q35: "60V P-Channel Logic Level PowerTrench MOSFET"
Q2 Q13 Q22 Q34: "60V N-Channel PowerTrench MOSFET"
Q7 Q12: "Quad NPN General Purpose Amplifier"
Q23 Q24 Q25 Q26 Q29 Q30 Q31 Q32: library part IRFx3306PbF, "HEXFET Power MOSFET"
S1: "SPST Button"
U1 U16: "Current Sensor with Integrated Overcurrent Detection"
U2: "Dual 4-Channel Analog Multiplexers/Demultiplexers"
U3 U4: "IC DVR HIGH/LOW SIDE 3A 8SOPWR"
U5: "Mainstream Performance line, ARM Cortex-M3 MCU"
U6: "TXRX ESD 3.3V RS-485/422 10-DFN"
U7 U8: library part MCP970x, "Low-Power Linear Active Thermistor ICs"
U9: "IC USB SERIAL BASIC UART 16QFN"
U10: library part 636L3C, "HCMOS/TTL Clock Oscillator"
U11: "Minimum Parts High- or Low-Side MOSFET Driver"
U12: library part LM5050, "High-Side OR-ing FET Controller"
U13: "55V, 1.2A Step-Down Regulator with 2.8uA Quiescent Current"
U14: "250 mA, 16V, Low Quiescent Current LDO Regulator"
U15: library part L78LxxAx, "Positive Voltage Regulator"

## Free pads (board coordinates)
  round 215 hole 128.5: ""(150,150)
  round 215 hole 125: ""(150,2350) ""(2625,1000) ""(5095,2350) ""(5100,150)

## Via types
v1: diameter 29, hole 15, Top Layer to Bottom Layer, 174 vias
v2: diameter 30, hole 15, Top Layer to Bottom Layer, tented top, 12 vias
v3: diameter 30, hole 15, Top Layer to Bottom Layer, 6 vias
v4: diameter 19.68, hole 7.87, Top Layer to Bottom Layer, 2 vias

## Nets (pads, with @x,y where several pads share a name; then routed paths per layer and width w, separated by ;. In a path a pad name is that pad's centre, name@x,y a point inside that pad or via, vN(x,y) a via of type N, cw(c..) or ccw(c..) an arc to the next point about the centre after c; other vN are vias at no path point)
3V3: BATTEMP1.1 C2.1 C19.2 C20.2 C21.2 C22.2 C29.1 C30.1 C31.1 C32.1 C33.1 C34.1 C35.1 C39.1 C44.1 FB2.2 LED1.A LED2.A LED3.A LED4.A P1.1 Q27.S Q35.S R61.1 R63.1 R64.1 R69.1 R70.1 R71.1 R72.1 R80.1 R94.1 U2.16 U5.6 U5.11 U5.28 U5.50 U5.75 U5.100 U6.10 U7.1 U8.1 U10.4 U14.2 | length 2255.1
  Top Layer w10: BATTEMP1.1@2595,335 BATTEMP1.1@2603.5,343.5 ; C31.1@2910,208.5 2953.5,208.5 v1(2970.14,225.14) 2986.77,241.77 U5.50@2986.77,273.78 ; U5.28@2986.77,706.85 3028.15,706.85 3050,685 v1(3050,635) ; U5.11@3324.37,808.23 3324.37,705.63 v1(3325,705) ; U10.4@3400,906.69 3426.81,933.5 C35.1@3500,933.5 3548.5,933.5 v1(3550,935) ; U5.6@3422.8,808.23 3422.8,767.2 v1(3440,750) ; U5.75@3521.22,211.77 3558.23,211.77 v1(3575,195) ; U5.100@3583.23,746.22 3585,747.99 v1(3585,815) ; R64.1@4757.99,825 4800,825 v1(4825,850)
  Bottom Layer w10: v1(910,1750) 905.08,1754.92 Q35.S@905.08,1807.6 969.09,1807.6 R94.1@975,1813.5 ; C21.2@1135,623.5 1153.5,605 U7.1@1205,605 ; U2.16@1160,900.51 C2.1@1160,811.5 1196.5,775 v1(1225,775) ; C44.1@1755,1711.5 1760,1716.5 U14.2@1760,1912.99 ; v1(2340,1050) 2335.08,1054.92 Q27.S@2335.08,1102.6 2404.09,1102.6 R61.1@2405,1103.5 ; BATTEMP1.1@2595,335 BATTEMP1.1@2595,360 ; C30.1@2985,683.5 C34.1@3050,683.5 FB2.2@3110,683.5 ; C22.2@3206.5,1770 3210.43,1766.06 U8.1@3210.43,1702.4 3257.4,1702.4 v1(3290,1735) ; C29.1@3283.5,755 3283.5,746.5 v1(3325,705) ; C39.1@3401.5,820 3401.5,788.5 v1(3440,750) ; v1(3575,195) 3575,243.5 C32.1@3576.5,245 ; C33.1@3585,766.5 v1(3585,815) ; C19.2@4771.5,805 4783.58,817.09 U6.10@4783.58,880.63 4794.37,880.63 v1(4825,850) ; R63.1@5056.5,1530 v1(5110,1530)
  other v1: 1690,1790 1690,1845
5V: C45.2 C46.1 L2.2 Q28.S R62.1 R87.1 U13.1 U14.3 | length 4287.5
  Top Layer w10: v1(1825,1750) 2080,1750 v1(2145,1685)
  Top Layer w20: v1(1775,2105) 2226.82,2105 2473.82,2352 4057,2352 4749,1660 v1(4930,1660)
  Bottom Layer w10: R87.1@2095,1628.5 2145,1678.5 v1(2145,1685) 2131.5,1698.5 C45.2@2131.5,1755 ; Q28.S@5090.08,1687.6 5154.09,1687.6 R62.1@5160,1693.5
  Bottom Layer w20: v1(4930,1660) 5062.48,1660 Q28.S@5090.08,1687.6
15V: C15.1 C16.1 C48.1 U3.1 U4.1 U15.1 | length 2314.9
  Top Layer w20: v1(2725,1965) 2845,1965 2925,1885 v1(2985,1885) ; v1(3975,1815) 4045,1815 4140,1720 v1(4210,1720)
  Bottom Layer w10: C16.1@2671.26,1917.76 U3.1@2762.76,1917.76 ; C48.1@3629.06,1807.44 C48.1@3630,1816.5 ; U4.1@4187.24,1762.24 C15.1@4273.74,1762.24
  Bottom Layer w20: v1(2725,1965) 2725,1955.51 U3.1@2762.76,1917.76 ; v1(2985,1885) 3140,2040 3427.25,2040 3544.65,2157.4 3612.6,2157.4 3629.06,2140.94 U15.1@3629.06,1879.13 C48.1@3629.06,1807.44 ; C48.1@3630,1806.5 3966.5,1806.5 v1(3975,1815) ; U4.1@4187.24,1762.24 4210,1739.49 v1(4210,1720)
15V_EN: Q34.G R91.1 U5.38 | length 1336.3
  Top Layer w10: v1(2910,540) 2940,510 U5.38@2986.77,510 ; v1(3290,1790) 3290,1772.48 3375,1687.48
  Bottom Layer w10: v1(2910,540) 2895,555 2895,752.48 3125,982.48 3230.56,982.48 3400,1151.92 v1(3400,1185) ; v1(3290,1790) 3292.6,1792.6 Q34.G@3292.6,1930.08 ; R91.1@3290,1985 3292.6,1982.4 Q34.G@3292.6,1940.08
BAL1: R10.1 U5.59 | length 1165.8
  Top Layer w10: v1@2426.5,101.5 R10.1@2426.5,155 ; v1@3146.5,298.5 v1(3145,300) 3160,300 3206.26,253.74 U5.59@3206.26,211.77
  Bottom Layer w10: v1(2425,100) 2455,130 2455,276.97 2569.03,391 3069,391 3070,390 3095,390 3145,340 v1(3145,300)
BAL2: R11.1 U5.60 | length 1082.4
  Top Layer w10: v1(2425,225) 2426.5,226.5 R11.1@2426.5,280 ; v1(3180,325) 3225.94,279.06 U5.60@3225.94,211.77
  Bottom Layer w10: v1(2425,225) 2425,271.01 2561.99,408 3076.04,408 3077.04,407 3102.04,407 3180,329.04 v1(3180,325)
BAL3: R12.1 U5.61 | length 1063.7
  Top Layer w10: v1(2425,350) 2426.5,351.5 R12.1@2426.5,410 ; v1(3215,350) 3245.63,319.37 U5.61@3245.63,211.77
  Bottom Layer w10: v1(2425,350) 2479.95,350 2554.95,425 3140,425 v1(3215,350)
BAL4: R13.1 U5.62 | length 1094.5
  Top Layer w10: v1@2426.5,476.5 R13.1@2426.5,535 ; v1(3250,375) 3265.31,359.69 U5.62@3265.31,211.77
  Bottom Layer w10: v1(2425,475) 2438.43,475 2471.43,442 3183,442 v1(3250,375)
BAL5: R30.1 U5.63 | length 2159.4
  Top Layer w10: R30.1@1510,836.5 1681.5,836.5 v1(1700,855) ; U5.63@3285,211.77 v1(3285,400)
  Bottom Layer w10: v1(1700,855) 1713,842 1838,842 2178.5,501.5 2435.98,501.5 2478.48,459 3226,459 v1(3285,400)
BAL6: R31.1 U5.64 | length 2164.8
  Top Layer w10: R31.1@1571.5,900 1715,900 v1(1740,875) ; U5.64@3304.68,211.77 3304.68,369.69 3320,385 v1(3320,425)
  Bottom Layer w10: v1(1740,875) 1756,859 1845.04,859 2185.54,518.5 2443.02,518.5 2485.52,476 3269,476 v1(3320,425)
BAL7: R32.1 U5.65 | length 2294.5
  Top Layer w10: R32.1@1571.5,1025 1685.96,1025 1780,930.96 v1(1780,895) ; U5.65@3324.37,211.77 3324.37,364.37 3355,395 v1(3355,450) v1@3354.37,449.37
  Bottom Layer w10: v1(1780,895) 1799,876 1852.08,876 2192.58,535.5 2450.06,535.5 2492.56,493 3312,493 v1(3355,450)
BAL8: R33.1 U5.66 | length 2395.7
  Top Layer w10: R33.1@1571.5,1150 1606.5,1115 1644.04,1115 1835,924.04 v1(1835,905) ; U5.66@3344.06,211.77 3344.06,359.06 3395,410 v1(3395,470)
  Bottom Layer w10: v1(1835,905) 1847.12,905 2199.62,552.5 2457.1,552.5 2499.6,510 3355,510 v1(3395,470)
BAT+: C14.1 C40.1 D3.A Q1.S Q23.D Q29.D Q30.D R1.1 U1.5 U1.6 U1.7 U1.8 U11.1 | length 4379.3
  Top Layer w10: Q30.D@1085,2120 1037.57,2072.57 1037.57,2000.35 1102.92,1935 1185,1935 U11.1@1185,2025.51
  Bottom Layer w10: R1.1@2315,2237.4 Q1.S@2384.92,2237.4 2384.92,2369.21
  Bottom Layer w80: 965,2120 Q30.D@1085,2120 ; Q29.D@1435,2120 1555,2120 ; 2924.33,2120 Q23.D@3030,2120 3351.57,2120 C14.1@3371.57,2100
  Bottom Layer w200: 485,2374.13 935,2374.13 ; 965,2120 935,2150 935,2374.13 ; 1555,2120 1585,2150 1585,2374.13 ; 2924.33,2120 2670.19,2374.13 1585,2374.13 ; 935,2374.13 1585,2374.13
BAT_CVH: U2.3 U5.31 | length 2042.4
  Top Layer w10: v1(1570,1095) 1640,1095 1808.5,926.5 1808.5,891.5 1844,856 1844,785.04 1981.25,647.8 U5.31@2986.77,647.8
  Bottom Layer w10: U2.3@1260,1089.49 1260,1071.5 1297.32,1034.18 1303.3,1034.18 1307.48,1030 1515.68,1030 1570,1084.32 v1(1570,1095)
BAT_CVL: U2.13 U5.32 | length 1878.6
  Top Layer w10: v1(1305,825) 1305,818.1 1382.26,740.83 1534.66,740.83 1575.32,781.5 1823.5,781.5 1975.83,629.17 2985.72,629.17 U5.32@2986.77,628.11
  Bottom Layer w10: v1(1305,825) 1310,830 U2.13@1310,900.51
BAT_CVSELA: U2.10 U5.43 | length 1792.4
  Top Layer w10: v1(2680,540) 2706.5,513.5 2727.46,513.5 2829.38,411.57 U5.43@2986.77,411.57
  Bottom Layer w10: U2.10@1460,900.51 1460,930 1485.82,955.82 1848.22,955.82 2217.54,586.5 2471.18,586.5 2491.18,566.5 2653.5,566.5 v1(2680,540)
BAT_CVSELB: U2.9 U5.44 | length 1713.1
  Top Layer w10: v1(2635,540) 2678.5,496.5 2720.42,496.5 2825.03,391.89 U5.44@2986.77,391.89
  Bottom Layer w10: U2.9@1510,900.51 1540.99,931.5 1848.5,931.5 2210.5,569.5 2464.14,569.5 2493.64,540 v1(2635,540)
BAT_I: U1.12 U5.29 | length 3137.7
  Top Layer w10: v1(735,1990) 735,1723.88 1063.88,1395 1441.52,1395 1668.5,1168.02 1668.5,1141.5 1878.5,931.5 1878.5,798.62 1989.96,687.17 U5.29@2986.77,687.17
  Bottom Layer w10: U1.12@684.34,2066.01 735,2015.36 v1(735,1990)
BAT_SENS_EN: Q2.G Q13.G Q22.G R5.1 U5.45 | length 5704.3
  Top Layer w10: Q22.G@67.6,584.92 402.52,250 1090,250 1315,25 1883.28,25 1905.88,47.6 Q13.G@2100.08,47.6 2164.09,47.6 R5.1@2170,53.5 2558.5,53.5 v1(2805,300) ; v1(2595,595) 2595,542.52 2658.02,479.5 2713.38,479.5 2820.67,372.2 U5.45@2986.77,372.2 3027.8,372.2 v1(3055,345) ; v1(2600,1965) 2653,1912 2653,1301.44 2745,1209.44 v1(2745,1185)
  Bottom Layer w10: v1(2595,595) 2738.48,595 2810,666.52 2810,787.68 2869.3,846.98 2869.3,1060.7 v1(2745,1185) ; v1(2600,1965) 2602.4,1967.4 Q2.G@2602.4,2019.92 ; v1(2805,300) 2818,287 3017.96,287 3055,324.04 v1(3055,345)
BAT_V: C4.1 R3.2 R4.1 U5.24 | length 1651.3
  Top Layer w10: v1(2670,2060) 2670,1308.48 3068.46,910.02 U5.24@3068.46,808.23
  Bottom Layer w10: R3.2@2540,2236.5 2547.01,2236.5 R4.1@2610,2173.5 C4.1@2670,2113.5 v1(2670,2060)
BOOST_H: U3.5 U5.42 | length 1641.2
  Top Layer w10: v1(2725,540) 2833.74,431.26 U5.42@2986.77,431.26 ; v1(2870,1715) 2853.5,1698.5 2853.5,1236.5 v1(2910,1180)
  Bottom Layer w10: v1(2725,540) 2725,557.48 2827,659.48 2827,780.64 2886.3,839.94 2886.3,1156.3 v1(2910,1180) ; U3.5@2857.24,1762.24 2857.24,1727.76 v1(2870,1715)
BOOST_L: U3.6 U5.41 | length 1582.9
  Top Layer w10: v1(2775,540) 2864.06,450.94 U5.41@2986.77,450.94 ; v1(2825,1715) 2835,1705 2835,1210 2915,1130 v1(2920,1130)
  Bottom Layer w10: v1(2775,540) 2782.48,540 2844,601.52 2844,773.6 2903.3,832.9 2903.3,1113.3 v1(2920,1130) v1@2915,1130 ; v1(2825,1715) 2825.75,1715.75 U3.6@2825.75,1762.24
BOOT0: R77.1 U5.94 U9.12 | length 76.1
  Top Layer w10: U5.94@3583.23,628.11 3656.61,628.11 R77.1@3658.5,630
BUCK_H: U4.5 U5.40 | length 2996.2
  Top Layer w10: v1(2820,540) 2889.37,470.63 U5.40@2986.77,470.63 ; v1(3310,1185) 3310,1172.52 3389.02,1093.5 3687.46,1093.5 3712.96,1068 3902.04,1068 4253.5,1419.46 4253.5,1873.98 4135.98,1991.5 4096.5,1991.5 v1(4080,1975)
  Bottom Layer w10: v1(2820,540) 2861,581 2861,766.56 3110.92,1016.48 3216.48,1016.48 3310,1110 v1(3310,1185) ; v1(4080,1975) 4092.76,1962.24 U4.5@4092.76,1917.76
BUCK_L: U4.6 U5.39 | length 2764.5
  Top Layer w10: v1(2865,540) 2914.69,490.31 U5.39@2986.77,490.31 ; v1(3355,1185) 3355,1165 3409.5,1110.5 3694.5,1110.5 3720,1085 3895,1085 4236.5,1426.5 4236.5,1858.5 4130,1965 v1(4125,1965)
  Bottom Layer w10: v1(2865,540) 2878,553 2878,759.52 3117.96,999.48 3223.52,999.48 3355,1130.96 v1(3355,1185) ; U4.6@4125,1918.5 U4.6@4124.25,1917.76 4124.25,1964.25 v1(4125,1965)
BUZZER: U5.48
C1: BAL1.8 Q3.S Q14.S R6.1 R15.2 | length 1553.9
  Top Layer w20: BAL1.8@1068.98,370 1118.5,419.53 1320,419.53 1439.53,300 1830.91,300 R15.2@1850.91,280
  Bottom Layer w10: Q3.S@1495.08,47.6 1559.09,47.6 R6.1@1565,53.5 ; Q14.S@1790.08,277.6 R15.2@1848.5,277.6
  Bottom Layer w20: BAL1.8@1068.98,370 1118.5,320.47 1227.65,320.47 1495.08,53.05 Q3.S@1495.08,47.6